# EAGLE board pcb final design schematic pcb v4 (EAGLE 9.7.0)
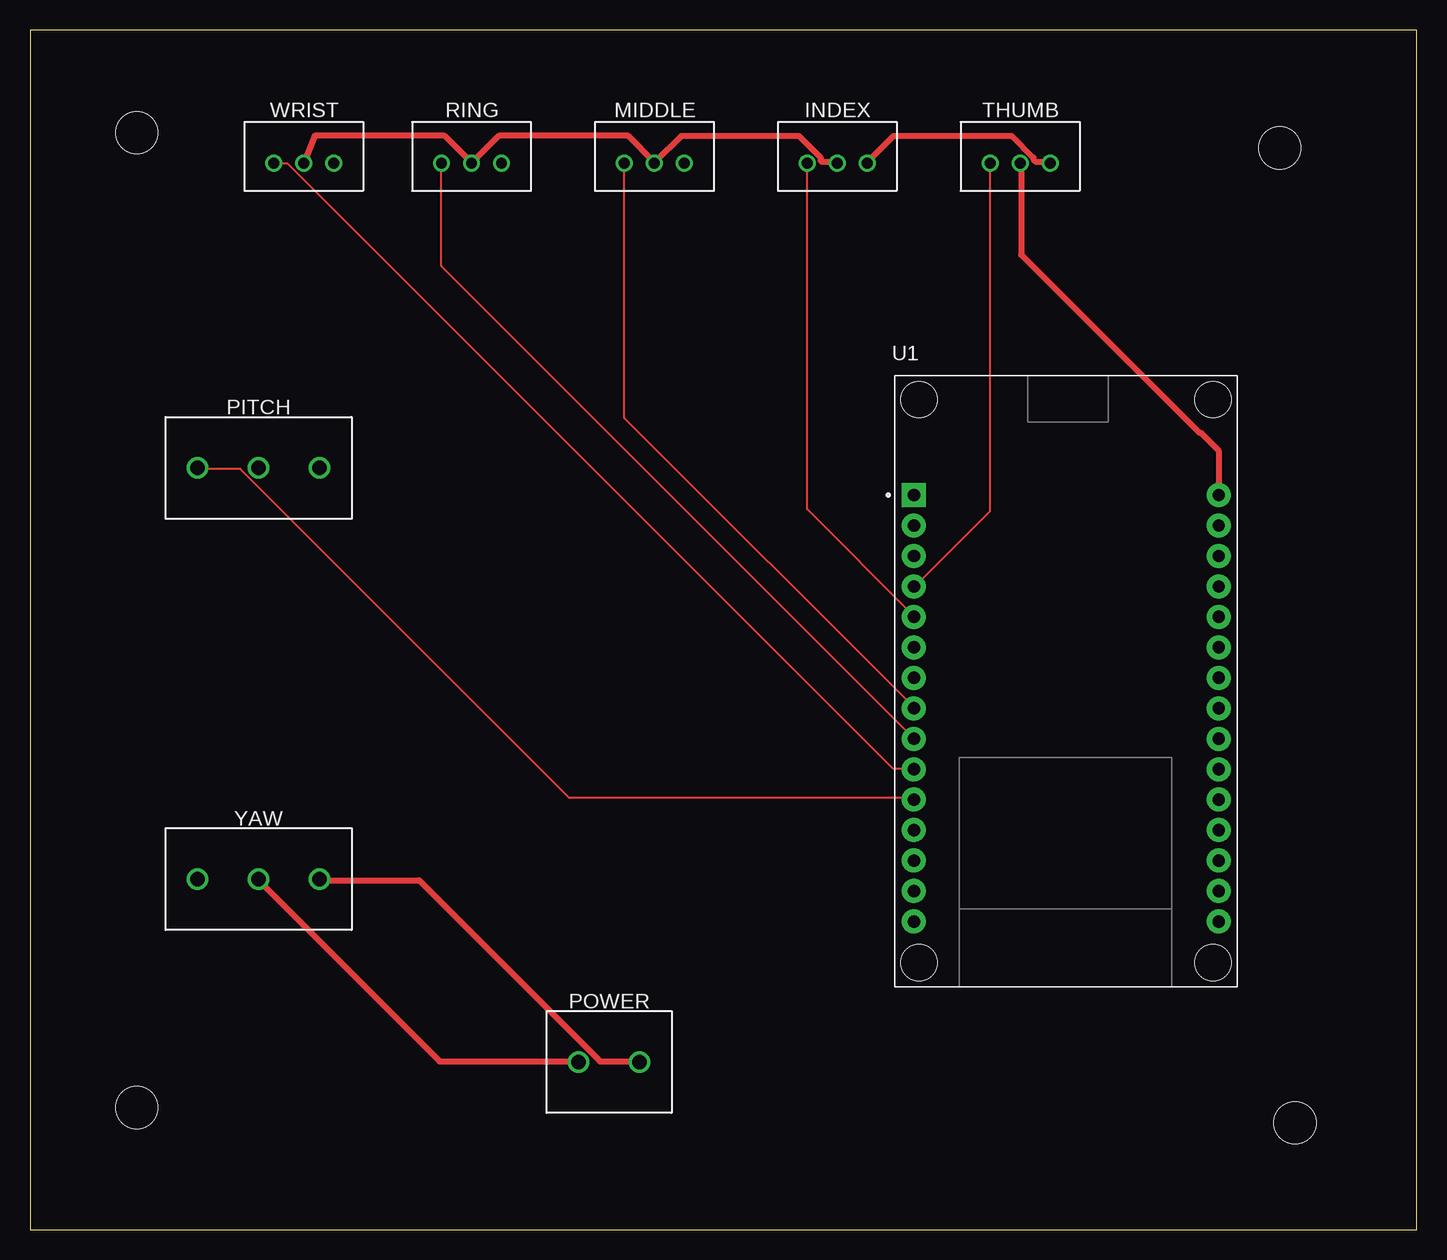
[diagram p0: board, top side]
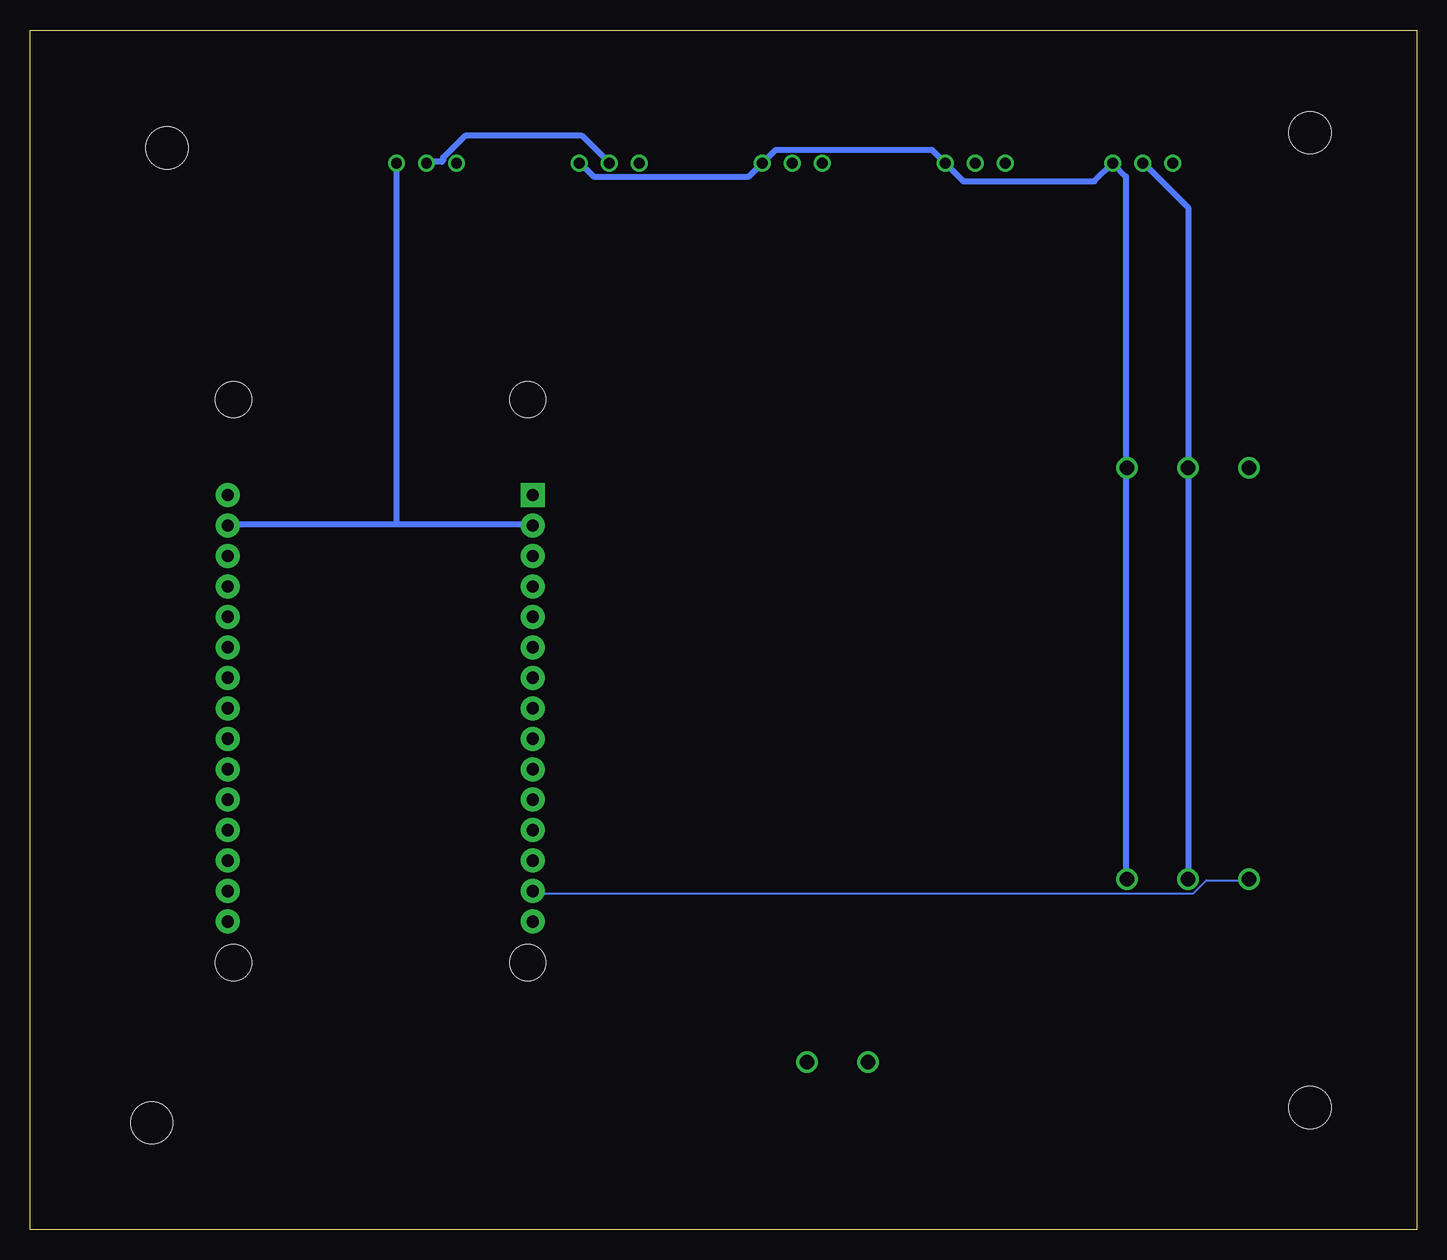
[diagram p1: board, bottom side, seen from below]

Size 115.55 x 100 mm. Coordinates in mm from the lower left corner, seen from the top.
Outline: 0,0 115.55,0 115.55,100 0,100 0,0
Copper layers (1*16): Top / Bottom
Stack-up Default Layer Stack: Top User Defined 0.035mm / Dielectric-1 User Defined 1.5mm / Bottom User Defined 0.035mm
Design rules: minimum copper width 6mil, minimum drill size 0.35mm, copper clearance wire_polygon to wire_polygon 6mil, copper clearance wire_polygon to pad_smd 6mil, copper clearance wire_polygon to via 6mil, copper clearance pad_smd to pad_smd 6mil, copper clearance pad_smd to via 6mil, copper clearance via to via 6mil, copper clearance smd to pad (same net) 6mil, copper clearance smd to via (same net) 6mil, copper clearance smd to smd (same net) 6mil, dimension clearance 40mil, via restrict clearance 0mil, restrict clearance 0mil, drill distance 6mil, keepout clearance 0mil
Holes 3.5 mm at 8.89,91.44 8.89,10.16 105.41,8.89 104.14,90.17

## Footprints (pad centres in the part's own frame; a part is rotated, then mirrored left to right if it is on the bottom)
B3B-XH-A = drill 0.9: 1 0,0; 2 2.5,0; 3 5,0
TERMBLK_508-3N = drill 1.2: 1 0,0; 2 5.08,0; 3 10.16,0
TERMBLK_508-2N = drill 1.2: 1 0,0; 2 5.08,0
MODULE_ESP32_DEVKIT_V1 = drill 1.02 pad 2 square: 1 -12.7,15.515 | drill 1.02 pad 2: 2 -12.7,12.975; 3 -12.7,10.435; 4 -12.7,7.895; 5 -12.7,5.355; 6 -12.7,2.815; 7 -12.7,0.275; 8 -12.7,-2.265; 9 -12.7,-4.805; 10 -12.7,-7.345; 11 -12.7,-9.885; 12 -12.7,-12.425; 13 -12.7,-14.965; 14 -12.7,-17.505; 15 -12.7,-20.045; 16 12.7,-20.045; 17 12.7,-17.505; 18 12.7,-14.965; 19 12.7,-12.425; 20 12.7,-9.885; 21 12.7,-7.345; 22 12.7,-4.805; 23 12.7,-2.265; 24 12.7,0.275; 25 12.7,2.815; 26 12.7,5.355; 27 12.7,7.895; 28 12.7,10.435; 29 12.7,12.975; 30 12.7,15.515 | hole 3: -12.28,-23.475; 12.23,-23.475; 12.23,23.475; -12.28,23.475

## Placement (x,y rotation side)
INDEX  B3B-XH-A  [B3B-XH-A]  64.77,88.9 0 top
MIDDLE  B3B-XH-A  [B3B-XH-A]  49.53,88.9 0 top
PITCH  2828XX-3282837-3  [TERMBLK_508-3N]  13.97,63.5 0 top
POWER  2828XX-2282837-2  [TERMBLK_508-2N]  45.72,13.97 0 top
RING  B3B-XH-A  [B3B-XH-A]  34.29,88.9 0 top
THUMB  B3B-XH-A  [B3B-XH-A]  80.01,88.9 0 top
U1  ESP32-DEVKIT-V1  [MODULE_ESP32_DEVKIT_V1]  86.36,45.72 0 top
WRIST  B3B-XH-A  [B3B-XH-A]  20.32,88.9 0 top
YAW  2828XX-3282837-3  [TERMBLK_508-3N]  13.97,29.21 0 top

## Library data of the parts
INDEX MIDDLE RING THUMB WRIST = Connector; CATEGORY: Connectors; DATASHEET: https://www.jst-mfg.com/product/pdf/eng/eXH.pdf; DESCRIPTION: Connector Header Through Hole 3 position 0.098" (2.50mm); MANUFACTURER: JST Sales America Inc.; MPN: B3B-XH-A; OPERATING_TEMPERATURE: -25°C ~ 85°C; PACKAGE_SIZE: NA; PACKAGE_TYPE: Through Hole; PART_STATUS: Active; PITCH: 0.098" (2.50mm); ROHS: Compliant; SERIES: XH; SUBCATEGORY: Rectangular Connectors; TYPE: Male Headers
PITCH YAW = Connector; CATEGORY: Connectors; DATASHEET: https://www.te.com/usa-en/product-282837-3.datasheet.pdf; DESCRIPTION: 3 Position Wire to Board Terminal Block Horizontal with Board 0.200" (5.08mm) Through Hole; MANUFACTURER: TE Connectivity AMP Connectors; MPN: 282837-3; OPERATING_TEMPERATURE: -40°C ~ 105°C; PACKAGE_SIZE: NA; PACKAGE_TYPE: Through Hole; PART_STATUS: Active; PITCH: 0.200" (5.08mm); ROHS: Compliant; SERIES: Buchanan; SUBCATEGORY: Terminal Block; TYPE: Screw Terminal - Rising Cage Clamp Side Wire Entry
POWER = Connector; CATEGORY: Connectors; DATASHEET: https://www.te.com/usa-en/product-282837-2.datasheet.pdf; DESCRIPTION: 2 Position Wire to Board Terminal Block Horizontal with Board 0.200" (5.08mm) Through Hole; MANUFACTURER: TE Connectivity AMP Connectors; MPN: 282837-2; OPERATING_TEMPERATURE: -40°C ~ 105°C; PACKAGE_SIZE: NA; PACKAGE_TYPE: Through Hole; PART_STATUS: Active; PITCH: 0.200" (5.08mm); ROHS: Compliant; SERIES: Buchanan; SUBCATEGORY: Terminal Blocks; TYPE: Screw Terminal - Rising Cage Clamp Side Wire Entry
U1 = ESP32-DEVKIT-V1; AVAILABILITY: Not in stock; CHECK_PRICES: https://www.snapeda.com/parts/ESP32-DEVKIT-V1/Do+it/view-part/?ref=eda; DESCRIPTION: Dual core, Wi-Fi: 2.4 GHz up to 150 Mbits/s,BLE (Bluetooth Low Energy) and legacy Bluetooth, 32 bits, Up to 240 MHz; MF: Do it; MP: ESP32-DEVKIT-V1; PACKAGE: None; PRICE: None; SNAPEDA_LINK: https://www.snapeda.com/parts/ESP32-DEVKIT-V1/Do+it/view-part/?ref=snap

## Nets
7.2V: INDEX.2 MIDDLE.2 PITCH.2 POWER.1 RING.2 THUMB.2 U1.30 WRIST.2 YAW.2
GND: INDEX.3 MIDDLE.3 PITCH.3 POWER.2 RING.3 THUMB.3 U1.2 U1.29 WRIST.3 YAW.3
INDEXSIG: INDEX.1 U1.5
MIDDLESIG: MIDDLE.1 U1.8
PITCHSIG: PITCH.1 U1.11
RINGSIG: RING.1 U1.9
THUMBSIG: THUMB.1 U1.4
WRISTSIG: U1.10 WRIST.1
YAWSIG: U1.14 YAW.1

## Tracks (layer width: path | path; a pad name or v marks a point on that pad's centre or on a via)
7.2V
  Top 0.152: 45.72,14.02 POWER.1 | 19.05,29.11 YAW.2 | 36.73,89 RING.2 36.88,89 | 52.03,88.99 MIDDLE.2 52.12,89 | 67.21,89 INDEX.2 | THUMB.2 82.6,88.85
  Top 0.508: 45.72,14.02 34.14,14.02 19.05,29.11 | 36.73,89 34.54,91.19 23.72,91.19 WRIST.2 | 52.03,88.99 49.84,91.19 39.06,91.19 36.88,89 | 67.21,89 65.99,89 65.88,89.11 65.88,89.36 64.05,91.19 54.3,91.19 52.12,89 | U1.30 99.06,64.92 97.56,66.42 97.44,66.42 82.6,81.27 82.6,88.85
  Bottom 0.152: 82.45,89 THUMB.2 | INDEX.2 67.36,89 | 22.71,88.85 WRIST.2
  Bottom 0.508: YAW.2 PITCH.2 19.05,85.19 22.71,88.85 | 82.45,89 81.23,89 81.12,89.11 81.12,89.36 79.29,91.19 69.55,91.19 67.36,89
GND
  Top 0.152: 50.75,14.02 POWER.2 | YAW.3 24.23,29.11 | 84.89,89 THUMB.3 | INDEX.3 69.8,89
  Top 0.508: 24.23,29.11 32.43,29.11 47.52,14.02 50.75,14.02 | 84.89,89 83.82,89 83.62,89.2 83.62,89.36 81.79,91.19 71.98,91.19 69.8,89
  Bottom 0.152: 24.23,29.26 YAW.3 | 24.23,63.4 PITCH.3 24.23,63.55 | 73.76,58.83 U1.2 | 99.06,58.83 U1.29 | INDEX.3 69.65,88.85 | MIDDLE.3 54.41,89 | 85.04,88.85 THUMB.3 | 25.3,88.85 WRIST.3
  Bottom 0.508: 24.23,63.4 24.23,29.26 | 99.06,58.83 85.04,58.83 | 85.04,58.83 73.76,58.83 | WRIST.3 26.84,87.38 37.77,87.38 RING.3 40.4,90.01 53.4,90.01 54.41,89 | 69.65,88.85 68.59,87.79 55.64,87.79 MIDDLE.3 | 85.04,88.85 85.04,58.83 | 24.23,63.55 24.23,87.78 25.3,88.85
INDEXSIG
  Top 0.152: INDEX.1 64.77,60.05 73.61,51.21 U1.5
MIDDLESIG
  Top 0.152: MIDDLE.1 49.53,67.67 73.61,43.59 U1.8
PITCHSIG
  Top 0.152: PITCH.1 14.02,63.4 17.53,63.4 44.96,35.97 73.61,35.97 U1.11
RINGSIG
  Top 0.152: RING.1 34.29,80.31 73.61,41 U1.9
THUMBSIG
  Top 0.152: THUMB.1 80.01,59.89 73.76,53.65 U1.4
WRISTSIG
  Top 0.152: WRIST.1 20.42,88.85 21.49,88.85 71.93,38.41 73.61,38.41 U1.10
YAWSIG
  Bottom 0.152: YAW.1 14.02,29.11 17.53,29.11 18.59,28.04 73.46,28.04 73.61,28.19 U1.14